# Altium PCB ESP32_USBC_PCB.PcbDoc (part 3 of 3)
Units mil, origin at the board's own origin, x right, y up, seen from the top; angles counter-clockwise.
Board outline 2700 x 1000 mil, 4 copper layers (L1, L2, L3, L4), stack 61.583 mil thick; 64 components, 73 nets, 299 pads, 162 vias.
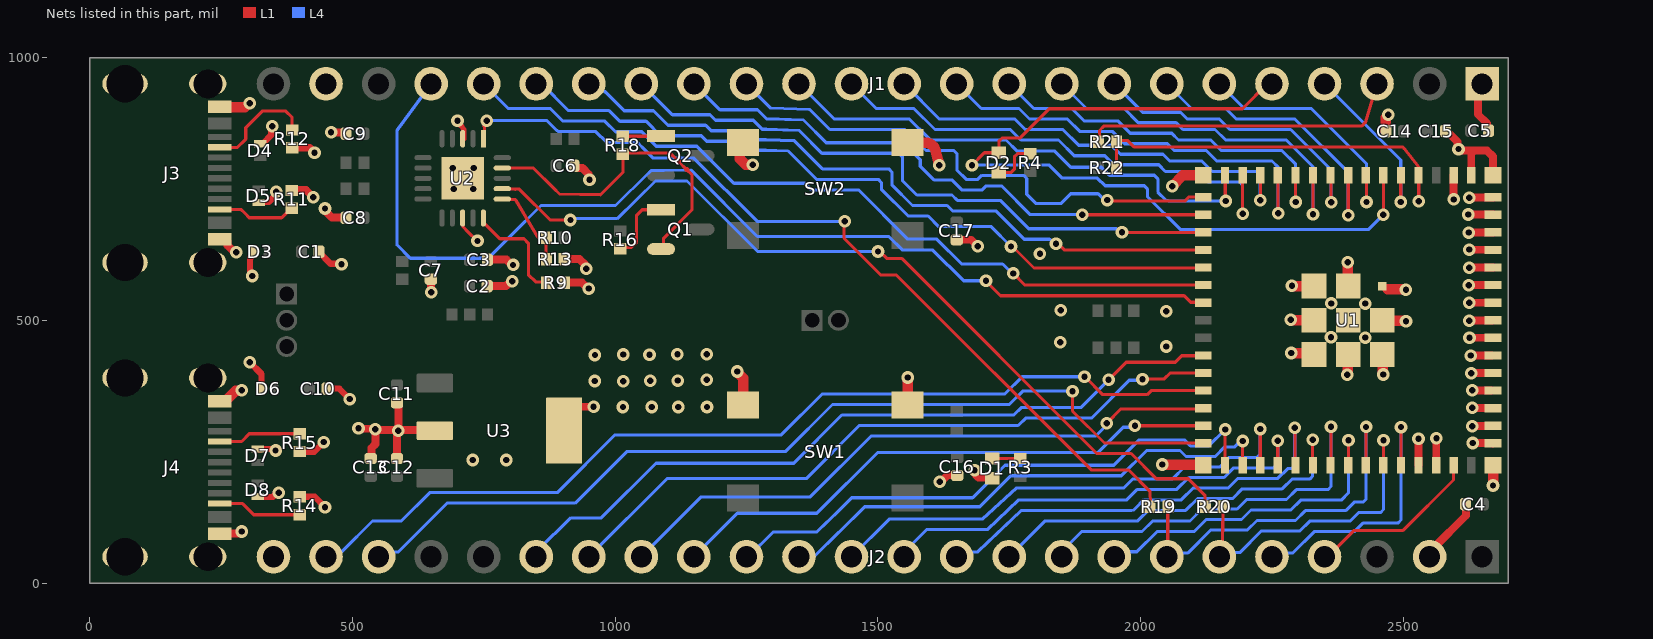
[diagram p4: the nets of this part, all layers, seen from the top]

## Via types
v1: diameter 24, hole 12, L1 to L4, tented both sides, 162 vias

## Nets (pads, with @x,y where several pads share a name; then routed paths per layer and width w, separated by ;. In a path a pad name is that pad's centre, name@x,y a point inside that pad or via, vN(x,y) a via of type N, cw(c..) or ccw(c..) an arc to the next point about the centre after c; other vN are vias at no path point) (continued)
GND: C1.1 C2.1 C3.1 C4.1 C5.1 C6.1 C7.1 C8.1 C9.1 C10.1 C11.1 C12.1 C13.1 C14.1 C15.1 C16.1 C17.1 D1.1 D3.1 D4.1 D5.1 D6.1 D7.1 D8.1 J1.1 J1.23 J2.2 J2.24 J3.A1B12 J3.B1A12 J3.S1 J3.S2 J3.S3 J3.S4 J4.A1B12 J4.B1A12 J4.S1 J4.S2 J4.S3 J4.S4 R9.2 R11.1 R12.1 R13.2 R14.1 R15.1 SW1.3 SW1.4 SW2.3 SW2.4 U1.1 U1.2 U1.42 U1.43 U1.46 U1.47 U1.48 U1.49 U1.50 U1.51 U1.52 U1.53 U1.54 U1.55 U1.56 U1.57 U1.58 U1.59 U1.60 U1.61 U1.62 U1.63 U1.64 U1.65 U1.66 U1.67 U1.68 U1.69 U1.70 U1.71 U1.72 U1.73 U2.3 U2.13 U2.21 U3.2 U3.4 | length 3754.5
  L1 w6: U2.13@710.68,693.24 710.68,677.85 719.91,668.62 v1@737.57,650.95
  L1 w10.01: C9.1@483.07,857.58 C9.1@488.07,855 ; v1(700.18,879.77) v1@705.47,871 ; v1@707.51,870.62 712.04,863.11 U2.3@712.04,845.03
  L1 w12: v1(305,420) 327.2,397.8 D6.1@327.2,370 ; v1(309.54,584.13) 309.54,587.38 305.37,591.55 305.37,618.24 312.2,625.08 D3.1@312.2,630 ; D7.1@319.06,254.14 D7.1@325.84,254.14 ; D7.1@320.03,255.03 351.17,255.03 v1@356.76,249.44 ; D8.1@320.64,163.77 348.52,163.77 356.75,172 v1(360,172) ; D5.1@322.17,724.07 323.06,724.96 341.23,724.96 352.78,736.5 352.78,742.27 v1(355.07,744.56) ; D4.1@324.5,835.79 329.43,835.79 330.32,836.68 330.32,836.78 346.05,852.52 346.05,867.8 v1(347.63,869.37) ; R14.1@400,164.02 428.31,164.02 v1(447.96,144.37) ; R15.1@400,250 427.67,250 v1(445.89,268.22) ; C1.1@436.88,630.53 436.88,629.35 458.48,607.75 478.13,607.75 v1(479.37,606.51) ; C10.1@451.93,370 475,370 v1(495,350)
  L1 w15: J4.B1A12@247.64,94.09 247.94,94.4 285.92,94.4 v1(289.6,98.08) ; J3.B1A12@247.64,653.94 258.46,653.94 262.78,649.63 262.78,642.44 274.34,630.88 277.37,630.88 v1(279.1,629.16) ; R11.1@385.09,747.62 412.16,747.62 v1(425.44,734.34) ; R12.1@385.54,828.18 418.82,828.18 v1(428,819) ; v1(448.14,712.69) 449.87,710.97 449.87,706.93 461.09,695.71 484.94,695.71 485.65,695 C8.1@488.07,695 ; v1(459.61,857.58) C9.1@483.07,857.58 ; v1(511.83,294.39) 512.64,293.57 543,293.57 544.28,292.3 544.28,264.73 536.22,256.67 536.22,238.15 C13.1@535,236.93 ; v1@545.26,291.31 545.3,291.27 585.85,291.27 v1(587.34,289.79) v1@588.25,290.71 ; C11.1@585,343.07 585.12,343.07 588.25,339.94 v1@588.25,290.71 ; C12.1@585.21,237.14 585.21,285.23 588.25,288.27 v1@588.25,288.87 ; C7.1@649.62,577.96 649.82,577.76 649.82,553.25 v1(650.02,553.05) ; U3.2@656.97,290 655.66,291.31 588.86,291.31 v1@588.25,290.71 ; C2.1@756.93,565 792.39,565 801.86,574.48 v1(804.3,574.48) ; C3.1@757.56,615.31 793.54,615.31 803.52,605.33 v1(805.96,605.33) ; U3.4@903.03,290 U3.4@903.03,308.07 ; R13.2@903.38,616.25 932.43,616.25 943.65,605.03 943.65,599.72 v1(945.38,598) ; R9.2@903.72,571.74 936.85,571.74 948.31,560.27 v1(949.81,560.27) ; C6.1@921.59,793.96 921.59,792.78 924.72,789.65 937.97,789.65 949.54,778.08 949.54,769.17 v1(951.26,767.45) ; U3.4@929.98,335.02 929.98,335.43 v1(959.09,335.43) ; v1(1618,193) 1620.44,193 1632.82,205.39 C16.1@1641.97,205.39 ; C17.1@1650.06,653.13 1677.87,653.13 v1(1690,641) ; v1(1684.14,214.41) 1685.86,212.69 1685.86,206.31 1691.38,200.8 D1.1@1716.8,200.8 ; U1.42@2528.94,224.48 v1(2528.94,274.63) ; J2.2@2558.42,58.42 2558.42,67.63 2618.95,128.16 2618.95,149.12 C4.1@2618.07,150 ; U1.43@2562.46,225.22 2562.65,225.42 2562.65,275.41 v1(2562.94,275.7) ; C15.1@2579.93,860 2579.93,858.82 2583.06,855.69 2586.94,855.69 2603.28,839.35 2603.28,827.47 v1(2605,825.75) ; v1(2595.77,729.97) U1.2@2595.83,775.59 ; v1@2605.77,824.98 2610.66,824.98 2612.46,823.19 2635.69,823.19 ; v1(2623.63,701.36) 2623.92,701.07 2670.35,701.07 U1.59@2670.63,700.79 ; v1(2624.39,666.87) 2624.61,667.1 2670.4,667.1 U1.58@2670.72,667.42 ; v1(2624.69,566.58) 2624.86,566.75 2669.84,566.75 U1.55@2670.01,566.58 ; v1(2625.18,498.95) 2625.86,499.63 2669.19,499.63 U1.53@2669.58,500.01 ; v1(2625.29,533.3) 2625.37,533.38 2670.8,533.38 U1.54@2670.88,533.3 ; v1(2625.29,634.5) 2625.61,634.18 2670.28,634.18 U1.57@2670.72,633.74 ; v1(2625.29,732.98) 2626.18,733.88 U1.60@2671.01,733.88 ; v1(2625.44,599.86) 2625.71,600.13 2670.65,600.13 U1.56@2670.72,600.06 ; v1(2625.9,466.77) 2626.02,466.65 2670.26,466.65 U1.52@2670.5,466.41 ; v1(2628.18,432.79) 2628.32,432.93 2668.01,432.93 U1.51@2668.06,432.99 ; U1.1@2629.29,775.59 2629.29,816.79 2635.69,823.19 ; v1(2629.37,399.18) 2629.59,399.39 2666.91,399.39 U1.50@2667.1,399.58 ; v1(2630.84,298.34) 2631.34,298.84 2665.62,298.84 U1.47@2666.03,299.25 ; v1(2630.93,333.27) 2631.22,332.97 2666.28,332.97 U1.48@2666.53,332.72 ; v1(2631,367) 2631.48,366.52 2666.5,366.52 U1.49@2667.04,365.97 ; v1(2631.81,266.49) 2632.18,266.12 2669.94,266.12 U1.46@2670.22,265.83 ; J1.1@2650,950 2641.73,941.73 2641.73,892.02 2659.02,874.72 C5.1@2659.02,863.95 ; U1.62@2670.63,775.59 2670.63,811.47 2658.91,823.19 2635.69,823.19
  L1 w20: J4.A1B12@247.64,346.06 258.46,346.06 278.55,366.15 288.71,366.15 v1(289.48,366.92) ; J3.A1B12@248.54,905.01 295.34,905.01 303.54,913.21 v1(304.62,913.21) ; v1(1232.38,402.55) 1232.38,401.46 1244.3,389.54 SW1.4@1244.3,339.38 ; SW2.4@1246,836.09 SW2.4@1243.5,838.58 ; SW2.4@1261.64,822.99 1246.05,838.58 SW2.4@1243.5,838.58 ; v1(1262,796) 1248.72,796 1237,807.72 1237,832.08 SW2.4@1243.5,838.58 ; SW1.3@1556.5,338.58 1557,339.09 v1(1557,391) ; SW2.3@1559.55,835.53 SW2.3@1556.5,838.58 1577.01,838 1590.47,838 cw(c1590.47,818) 1609.85,822.96 v1(1617,795) ; v1(2041.35,225.45) 2041.87,224.93 2118.93,224.93 U1.64@2119.45,224.41 ; v1(2060,755) 2080.59,775.59 U1.63@2119.45,775.59 ; v1(2285.8,500.86) 2286.23,500.43 2328.83,500.43 U1.72@2329.11,500.15 ; v1(2286.77,437.77) 2287.53,437 2324.73,437 U1.73@2328.25,433.48 ; v1(2287.98,565.41) 2288.2,565.19 2329.85,565.19 U1.71@2330.08,564.96 ; v1(2393.4,396.31) 2394.17,397.07 2394.17,426.92 U1.70@2394.94,427.69 ; v1(2394.14,610.15) 2394.59,609.71 2394.59,575.35 U1.69@2395.55,574.4 ; U1.68@2459.74,427.37 2460.77,426.34 2460.77,397.53 v1(2461.54,396.77) ; C14.1@2466.81,859.84 2466.81,885.48 2471.33,890 v1(2471.33,891.09) ; 2470.08,558.57 2504.24,558.57 v1(2504.92,557.89) ; U1.67@2471.33,498.55 2471.49,498.71 2504.4,498.71 v1(2505.16,497.95) ; J2.2@2550,50 J2.2@2558.42,58.42 ; v1(2605,825.75) v1@2605.77,824.98 ; v1@2670.7,185.7 U1.65@2670.7,224.34
  other v1: 2670.63,185.63 729,234 793,234 353.97,252.23 543.82,292.76 1015,335 1070,335 1120,335 1175,335 961.47,384.4 1015.84,383.98 1066.82,384.62 1119.07,385.25 1174.28,386.52 961.68,433.9 1065.55,434.12 1015.84,434.75 1118.64,435.38 1174.49,435.38 2049,450 1847,458 2427.7,467.09 2362.45,467.55 2049,517 1848,519 2363.06,532.08 2427.52,531.76 1808.48,626.51 738.15,650.95 693.04,749.62 730.04,749.62 691.04,789.62 731.04,789.62
GPIO0: R21.2 R22.2 U1.4 | length 716
  L1 w6: R22.2@1954.02,790 R21.2@1954.02,841.18 ; R21.2@1954.02,838.82 1957.43,842.24 1974.94,842.24 1987.21,829.97 2498.44,829.97 2501.77,826.64 2529.51,791.68 U1.4@2529.51,776.21 ; U1.4@2528.9,775.59 2529.2,775.29 2529.2,727.05 v1(2529.5,726.75)
GPIO1: J1.4 U1.5 | length 335.2
  L1 w6: v1(2495,725) U1.5@2495,775.16
  L4 w6: J1.4@2350,950 2495,805 v1(2495,725)
GPIO2: D2.1 J1.5 U1.6 | length 1586.3
  L1 w6: v1(1679.26,795.16) 1702.8,818.7 1725.6,818.7 1730.19,818.7 D2.1@1730,818.7 ; D2.1@1730.4,818.9 1730.4,840.72 1736.25,846.57 1770.07,846.57 1826.09,902.59 2193.94,902.59 2241.34,950 J1.5@2250,950 ; v1(2462.04,701.01) U1.6@2462.04,776.56
  L4 w6: v1(1679.26,795.16) 1679.75,795.65 1825.46,795.65 1850.61,770.5 1917.79,770.5 1932.43,755.86 2007.14,755.86 2013,750 2013,735.53 2075.49,673.04 2434.07,673.04 v1(2462.04,701.01) ; J1.5@2250,950 J1.5@2256.59,943.41
GPIO3: J1.6 U1.7 | length 466
  L1 w6: v1(2430,725) U1.7@2430,775.16
  L4 w6: J1.6@2150,950 2197,903 2324.94,903 2429.94,798 v1@2429.94,725.06
GPIO4: J1.7 U1.8 | length 571.9
  L1 w6: v1(2395.04,700.04) U1.8@2395.04,775.59
  L4 w6: J1.7@2050,950 2097,903 2162,903 2182,883 2293.72,883 2395.04,781.68 v1(2395.04,700.04)
GPIO5: J1.8 U1.9 | length 591.8
  L1 w6: v1(2362.59,724.8) U1.9@2362.59,774.96
  L4 w6: J1.8@1950,950 2004.14,895.86 2075.86,895.86 2088.72,883 2150,883 2170,863 2285.43,863 2362.59,785.84 v1(2362.59,724.8)
GPIO6: J1.9 U1.10 | length 709.5
  L1 w6: v1(2328.13,701.66) U1.10@2328.13,777.21
  L4 w6: J1.9@1850,950 1897,903 1968.72,903 1995.86,875.86 2067.57,875.86 2080.43,863 2141.72,863 2161.72,843 2277.15,843 2328.13,792.02 v1(2328.13,701.66)
GPIO7: J1.10 U1.11 | length 730.5
  L1 w6: v1(2295,725) U1.11@2295,775.16
  L4 w6: J1.10@1750,950 1797,903 1868.72,903 1892.29,879.43 1956.43,879.43 1980,855.86 2059.29,855.86 2072.15,843 2133.43,843 2153.43,823 2268.86,823 2295,796.86 v1(2295,725)
GPIO8: J1.11 U1.12 | length 838.2
  L1 w6: v1(2261.74,703.48) U1.12@2261.72,776.48
  L4 w6: J1.11@1650,950 1697,903 1768.72,903 1788.72,883 1860.43,883 1884,859.43 1946.43,859.43 1970,835.86 2051.01,835.86 2063.86,823 2125,823 2145,803 2250,803 2261.71,791.29 v1(2261.74,703.48)
GPIO9: J1.12 U1.13 | length 847.2
  L1 w6: v1@2227.86,726.28 U1.13@2227.86,775.44
  L4 w6: J1.12@1550,950 1617,883 1760.43,883 1780.43,863 1852.15,863 1882.07,833.07 1944.5,833.07 1961.72,815.86 2042.72,815.86 2055.58,803 2116.72,803 2136.72,783 2222,783 2227.86,777.14 v1@2227.86,728.58
  other v1: 2227.62,728.34
GPIO10: J1.13 U1.14 | length 951.6
  L1 w6: v1(2194.2,702.52) U1.14@2194.18,775.52
  L4 w6: J1.13@1450,950 1497,903 1568.72,903 1608.72,863 1752.15,863 1772.15,843 1843.86,843 1873.79,813.07 1931.78,813.07 1949,795.86 2034.44,795.86 2047.29,783 2108.43,783 2128.43,763 2188.3,763 2194.16,757.14 v1@2194.16,702.56
GPIO11: J1.14 U1.15 | length 966
  L1 w6: v1@2161.14,728.02 U1.15@2161.14,774.69
  L4 w6: J1.14@1350,950 1417,883 1560,883 1594.86,848.14 1595.29,848.14 1600.43,843 1743.86,843 1765.07,821.79 1836.79,821.79 1867.35,791.23 1925.34,791.23 1940.72,775.86 2026.15,775.86 2033,769.01 2033,743.82 2048.82,728 2052.42,728 2053.43,726.99 v1(2162.17,726.99)
GPIO12: J1.15 U1.16 | length 1025.2
  L1 w6: v1(1936.77,728.67) 1938.71,726.73 2084,726.73 2092.13,734.87 U1.16@2118.83,734.87
  L4 w6: J1.15@1250,950 1293.55,906.45 1296.33,903.67 1370.8,900.91 1373.58,898.14 1408.72,863 1551.72,863 1554.64,860.07 1583.19,831.53 1591.72,823 1644.83,823 1650.68,817.14 1650.68,785.54 1668.07,768.16 1690.44,768.16 1697.93,775.65 1777.53,775.65 1783.38,769.79 1783.38,739.92 1801.28,722.02 1848.18,722.02 1867.02,740.86 1919.14,740.86 1931.34,728.67 v1(1936.77,728.67) v1@1932.99,728.67
GPIO13: J1.16 U1.17 | length 1085.2
  L1 w6: v1(1889,701) 1889.21,700.79 U1.17@2119.45,700.79
  L4 w6: J1.16@1150,950 1196.47,903.53 1199.4,900.6 1271.12,900.6 1285.36,886.36 1288.14,883.58 1358.65,880.97 1401.86,837.75 1548.68,837.75 1580.76,805.67 1580.76,793.06 1606.72,767.1 1640.73,767.1 1659.68,748.16 1698.72,748.16 1706.22,755.65 1735.35,755.65 1790,701 v1(1889,701)
GPIO14: J1.17 U1.18 | length 1212.3
  L1 w6: v1(1964.68,667.32) U1.18@2119.45,667.32
  L4 w6: J1.17@1050,950 1108.99,891.01 1176.57,891.01 1180.71,891.01 1191.12,880.6 1262.83,880.6 1276.92,866.51 1279.85,863.58 1287.76,863.58 1350.06,861.27 1352.84,858.49 1393.57,817.75 1540.39,817.75 1546.73,811.41 1546.73,765.98 1574.26,738.45 1641.1,738.45 1651.39,728.16 1732.84,728.16 1786.89,674.11 1877.71,674.11 1877.82,674 1900.18,674 1900.29,674.11 1954.1,674.11 1960.89,667.32 v1(1964.68,667.32)
GPIO15: J1.18 U1.19 | length 1314
  L1 w6: v1(1839.07,645.79) 1842.86,645.79 1854.8,633.86 U1.19@2119.45,633.86
  L4 w6: J1.18@950,950 964.61,950 979.8,934.81 981.28,934.81 1017.5,898.59 1073.12,898.59 1100.71,871.01 1168.28,871.01 1172.42,871.01 1182.83,860.6 1254.55,860.6 1268.64,846.51 1271.57,843.58 1287.39,843.58 1341.02,841.59 1394.58,788.04 1520.87,788.04 1526.73,782.18 1526.73,757.69 1565.98,718.45 1631.91,718.45 1642.2,708.16 1724.56,708.16 1778.6,654.11 1826.97,654.11 1835.29,645.79 v1(1839.07,645.79)
GPIO16: J1.19 U1.20 | length 1421.8
  L1 w6: v1(1753.47,640.44) 1756.37,640.44 1797.3,599.51 2118.56,599.51 U1.20@2119.45,600.39
  L4 w6: J1.19@850,950 860.47,950 911.44,899.02 988.79,899.02 1009.22,878.59 1059,878.59 1086.58,851.01 1164,851.01 1165.28,849.87 1174.55,840.6 1246.26,840.6 1256.88,829.98 1263.28,823.58 1287.02,823.58 1329.36,822.01 1332.14,819.23 1383.33,768.04 1387.48,768.04 1500.87,768.04 1506.73,762.18 1506.73,749.41 1557.7,698.45 1595.69,698.45 1615.95,678.19 1715.72,678.19 v1(1753.47,640.44)
GPIO17: J1.20 U1.21 | length 1528.1
  L1 w6: v1(1757.59,589.11) 1779.59,567.11 2119.27,567.11 U1.21@2119.45,566.93
  L4 w6: J1.20@750,950 797.19,902.81 877.06,902.81 900.84,879.02 980.5,879.02 1000.93,858.59 1050.72,858.59 1078.3,831.01 1155.59,831.01 1158.11,828.49 1158.37,828.49 1226.09,760.78 1360.84,760.78 1373.58,748.04 1463.32,748.04 1557.04,654.32 1612.34,654.32 1659.5,607.17 1737.46,607.17 1755.52,589.11 v1(1757.59,589.11)
GPIO18: J1.21 U1.22 | length 2045.8
  L1 w6: v1@1705.85,574.2 1733.35,546.7 2082.87,546.7 2095.36,534.21 2118.7,534.21 U1.22@2119.45,533.46
  L4 w6: J1.21@650,950 586.93,863.9 585,861.26 585,857.99 585,736.49 584.88,736.37 584.88,643.72 585,643.6 585,643.5 610.5,618 758.6,618 800.47,659.86 800.6,659.86 859.05,718.32 1000.81,718.32 1062.81,779.21 1068.6,785 1092.86,785 1144.67,785.63 1270.78,659.51 1521.14,659.51 1547.09,633.56 1604.82,633.56 1663.25,575.13 v1(1705.85,575.13)
GPIO21: J2.19 U1.25 | length 1432.3
  L1 w6: v1(1939.09,386.73) 1972.46,420.1 2066.13,420.1 2078.44,432.4 U1.25@2118.78,432.4
  L4 w6: J2.19@850,50 850.13,59.79 853.05,62.71 915.97,124 974,124 1078,228 1340,228 1431.67,319.67 1758.72,319.67 1772.88,333.83 1886.18,333.83 v1(1939.09,386.73)
GPIO26: J2.18 U1.26 | length 1314.3
  L1 w6: v1(2003.68,387.92) 2004.14,388.38 2045.05,388.38 2056.28,399.61 U1.26@2119.45,399.61
  L4 w6: J2.18@950,50 1098.75,198.75 1363.75,198.75 1464.67,299.67 1767,299.67 1781.16,313.83 1906.58,313.83 1978.57,385.81 2001.58,385.81 v1(2003.68,387.92)
GPIO33: J2.17 U1.28 | length 1188.4
  L1 w6: v1(1935.34,303.85) 1962.76,331.27 2118.05,331.27 U1.28@2119.45,332.68
  L4 w6: J2.17@1050,50 1164,164 1371.57,164 1487.24,279.67 1877.37,279.67 1877.45,279.59 1914.19,279.59 1935.34,300.74 v1(1935.34,303.85)
GPIO34: J2.16 U1.29 | length 1072.7
  L1 w6: v1(1989.21,299.21) U1.29@2119.45,299.21
  L4 w6: J2.16@1150,50 1232.66,132.66 1384,132.66 1499.51,248.17 1918.39,248.17 1966.75,296.53 1986.53,296.53 v1(1989.21,299.21)
GPIO35: J2.15 U1.31 | length 1086.5
  L1 w6: U1.31@2161.09,226.22 2160.94,226.37 2160.94,291.92 v1(2161.09,292.07)
  L4 w6: J2.15@1250,50 1253.15,50 1300.95,97.1 1384.12,97.1 1426.43,138.75 1450.04,162.36 1680.36,162.36 1742,224 1948.85,224 1997.3,272.45 2083.16,272.45 2094.74,260.87 2129.89,260.87 v1(2161.09,292.07)
GPIO36: J2.14 U1.32 | length 998.2
  L1 w6: U1.32@2194.23,222.21 v1@2194.23,270.34
  L4 w6: J2.14@1350,50 1378.63,50 1475.12,145.09 1693.95,145.09 1752.85,204 1963.14,204 2011.4,252.25 2029.97,252.25 2030.17,252.45 2052.02,252.45 2052.22,252.25 2075.08,252.25 2086.46,240.87 2142.29,240.87 2160.46,259.04 2179.09,259.04 2187.74,267.68 2191.21,267.68 2194,264.9 2194,270.16 v1(2194.21,270.36)
GPIO37: J2.13 U1.33 | length 970.6
  L1 w6: U1.33@2227.75,227.74 v1@2227.75,293.16
  L4 w6: J2.13@1450,50 1521.69,121.69 1698.9,121.69 1764.3,181 1766.61,181 1968.43,181 1985.56,198.14 2060.86,198.14 2083.6,220.87 2150.58,220.87 2168.74,239.04 2221.92,239.04 2227.77,244.9 v1(2227.77,293.19)
GPIO38: J2.12 U1.34 | length 878.7
  L1 w6: U1.34@2261.15,224.25 v1(2261.12,270.59)
  L4 w6: J2.12@1550,50 1550,59.05 1592.63,101.69 1708.52,101.69 1768.09,158.29 1770.48,158.29 1899.01,158.29 1974,158.29 1993.85,178.14 2069.15,178.14 2091.88,200.87 2158.86,200.87 2177.03,219.04 2252.86,219.04 2261.12,227.29 v1(2261.12,270.59)
GPIO39: J2.11 U1.35 | length 860.7
  L1 w6: v1(2293.34,295.65) 2293.99,295 2293.99,222.39 U1.35@2294.87,221.51
  L4 w6: J2.11@1650,50 1659.26,59.26 1690.28,59.26 1773.42,138.29 1775.82,138.29 1982.28,138.29 1987.13,139 1990.06,141.93 2006.27,158.14 2077.43,158.14 2100.17,180.87 2167.15,180.87 2185.31,199.04 2261.15,199.04 2279.86,217.76 2287.48,217.76 2293.34,223.61 v1(2293.34,295.65)
GPIO40: J2.10 U1.36 | length 760
  L1 w6: U1.36@2327.45,222.21 v1(2327.45,272.37)
  L4 w6: J2.10@1750,50 1818.29,118.29 1994.71,118.29 2014.56,138.14 2085.72,138.14 2108.45,160.87 2175.43,160.87 2193.6,179.04 2269.43,179.04 2288.15,197.76 2321.59,197.76 2327.45,203.61 v1(2327.45,272.37)
GPIO41: J2.9 U1.37 | length 762.9
  L1 w6: U1.37@2362.41,221.78 v1(2362.41,297.33)
  L4 w6: J2.9@1850,50 1850,60 1888.11,98.11 2002.82,98.11 2022.84,118.14 2094,118.14 2116.74,140.87 2183.72,140.87 2201.88,159.04 2277.72,159.04 2296.43,177.76 2356.56,177.76 2362.42,183.61 v1(2362.41,297.33)
GPIO42: J2.8 U1.38 | length 646.3
  L1 w6: U1.38@2395.61,221.5 v1(2395.61,271.65)
  L4 w6: J2.8@1950,50 1959.63,59.63 1993.07,59.63 2031.58,98.14 2102.33,98.14 2125.07,120.87 2192,120.87 2210.17,139.04 2286,139.04 2304.72,157.76 2381.9,157.76 2395.61,171.46 v1(2395.61,271.65)
GPIO45: J2.5 U1.41 | length 526.9
  L1 w6: U1.41@2495.49,221.22 v1(2495.49,296.77)
  L4 w6: J2.5@2250,50 2257.03,57.03 2289.44,57.03 2330.17,97.76 2406.76,97.76 2423,114 2489.63,114 2495.49,119.86 v1(2495.49,296.77)
GPIO46: J2.4 U1.44 | length 334.5
  L1 w6: J2.4@2350,50 2356.19,50 2406.29,100.09 2499.52,100.09 2595.39,195.96 2595.39,223.97 U1.44@2595.83,224.41
GPIO47: J2.23 U1.27 | length 1826.9
  L1 w6: v1@1894.63,391.96 1928.01,358.58 2012.53,358.58 2020.09,366.14 U1.27@2119.45,366.14
  L4 w6: J2.23@450,50 460.33,60.33 480.78,60.33 538.41,117.96 593.46,117.96 647.5,172 890,172 1000,282 1316.4,282 1394.06,359.67 1741.72,359.67 1774.56,392.51 v1(1893.2,392.51)
GPIO48: J2.22 U1.30 | length 1762.9
  L1 w6: v1(1870.55,365.2) 1870.55,327.19 1931.33,266.41 1955.66,266.41 1955.81,266.56 1990.34,266.56 1990.65,266.25 U1.30@2118.94,266.25
  L4 w6: J2.22@550,50 559.1,59.1 587.37,59.1 680.27,152 924,152 1022,250 1324,250 1413.67,339.67 1750,339.67 1775.53,365.2 v1(1870.55,365.2)
JUMP_GPIO0: J1.3 R21.1 | length 609.9
  L1 w6: R21.1@1921.77,840.28 1921.77,861.21 1930.03,869.46 2418.03,869.46 2420.51,869.46 2427.59,876.54 J1.3@2450,950
NetD1_2: D1.2 R3.1 | length 53
  L1 w6: D1.2@1718,237 R3.1@1771,237.01
NetD2_2: D2.2 R4.1 | length 88.8
  L1 w6: D2.2@1730,781.3 1754.1,781.3 1759.96,787.16 1759.96,811.15 1765.81,817.01 R4.1@1790,817.01
NetJ3_A5: J3.A5 R12.2 | length 207.6
  L1 w6: J3.A5@248.06,828.71 281.32,828.71 295,842.4 297.31,844.71 297.31,866.53 328.76,897.98 373.36,897.98 385.54,885.79 R12.2@385.54,862.19
NetJ3_B5: J3.B5 R11.2 | length 151
  L1 w6: J3.B5@247.64,711.02 288.06,711.02 295,704.08 303.91,695.17 365.48,695.17 383.42,713.12 R11.2@384.6,713.12
NetJ4_A5: J4.A5 R15.2 | length 158.5
  L1 w6: J4.A5@247.64,269.29 289.29,269.29 304.02,284.02 R15.2@400,284.02
NetJ4_B5: J4.B5 R14.2 | length 161
  L1 w6: J4.B5@247.77,151.05 291.33,151.05 301.9,140.48 312.38,130 R14.2@400,130
NetQ1_1: Q1.1 R16.2 | length 138.4
  L1 w6: R16.2@1010,635.98 1012.55,638.53 1030.96,638.53 1041.05,648.62 1041.05,699.89 1051.56,710.39 Q1.1@1087.58,710.39
NetQ2_1: Q2.1 R18.2 | length 72.6
  L1 w6: R18.2@1015,850 1021.81,850.28 1065.86,850.28 Q2.1@1087.58,850.39
NetR9_1: R9.1 U2.15 | length 210
  L1 w6: U2.15@749.37,694.59 749.37,685.94 750.48,685.5 767.36,668.62 ; 767.38,668.6 780.75,655.23 826.64,655.23 835.14,646.73 835.14,586.69 848.76,573.07 867.71,573.07 R9.1@868.53,572.25
RTS_FTDI: Q1.2 R18.1 U2.19 | length 618.7
  L1 w6: U2.19@787.61,789.46 810.04,789.46 ; 808,789.84 844.42,789.84 883.04,751.22 894.29,740.18 972.29,738.71 1015,781.42 R18.1@1015,810.78 ; R18.1@1010.64,810.78 R18.1@1015,815.98 ; R18.1@1016.97,817.96 1105.12,817.96 1120.7,802.37 ; Q1.2@1087.8,635.59 1092.39,640.18 1092.39,656 1146.52,710.13 1146.52,776.56 1136.35,786.72 ; 1120.7,802.11 1136.09,786.72
  L1 w10.01: R18.1@1015,815.98 R18.1@1016.97,817.96 ; 1120.7,802.11 1120.7,802.37 ; 1136.09,786.72 1136.35,786.72
RXD_FTDI: R19.2 U2.1 | length 1630.8
  L1 w6: v1@749.6,869.64 755.63,875.67 v1(755.63,879.46) ; U2.1@751.63,856.56 v1@751.63,869.26 ; v1(1437.35,688.24) 1435.6,686.49 1435.6,656.24 1505.97,585.87 1535.53,585.87 1906.1,215.3 1976.89,215.3 2018.23,173.96 2018.82,151.81 R19.2@2017.99,145
  L4 w6: v1(755.63,879.46) 756.46,880.3 869.47,880.3 888.77,861 890.58,861 892.56,859.02 963.42,859.02 983.86,838.59 1042.43,838.59 1050.37,830.65 1050.53,830.5 1072.53,808.49 1150.09,808.49 1270.34,688.24 v1(1437.35,688.24)
TXD_FTDI: R20.2 U2.17 | length 1661.7
  L1 w6: U2.17@787.45,749.93 810.04,749.31 ; 808,749.69 815.62,749.49 818.01,749.42 819.7,747.73 876.69,690.73 v1(915.04,690.73) ; v1(1500.26,630.77) 1504.05,630.77 1516.97,617.85 1545.19,617.85 1916.63,246.41 1963.95,246.41 1964.09,246.56 1982.06,246.56 2030.17,198.45 2090.89,198.45 2118.26,171.08 2122.2,167.14 2122.2,166.31 2122.57,165.95 2122.57,145.43 R20.2@2122.99,145
  L4 w6: v1(915.04,690.73) 917.72,693.41 1003.99,693.41 1076.89,765 1137.01,765 1271.21,630.8 v1@1500.24,630.8
U0RXD: J2.6 R20.1 U1.40 | length 628.3
  L1 w6: J2.6@2150,50 2150.39,50.38 2155.43,55.42 2156.72,138.19 R20.1@2156.82,144.46 ; U1.40@2462.32,221.56 v1(2462.32,271.71)
  L4 w6: J2.6@2150,50 2157.89,57.89 2188.58,57.89 2229.74,99.04 2303.17,99.04 2321.88,117.76 2398.47,117.76 2414.72,134 2456.46,134 2462.32,139.86 v1(2462.32,271.71)
U0TXD: J2.7 R19.1 U1.39 | length 732.6
  L1 w6: J2.7@2050,50 2051.64,51.64 R19.1@2051.64,144.63 ; U1.39@2429.09,221.5 v1(2429.09,297.05)
  L4 w6: J2.7@2050,50 2057,57 2089.47,57 2133.35,100.87 2203.29,100.87 2221.45,119.04 2294.88,119.04 2313.6,137.76 2390.19,137.76 2406.43,154 2423.23,154 2429.09,159.86 v1(2429.09,297.05)
VBUS_SENSE: R10.1 R13.1 U2.16 | length 161.1
  L1 w6: U2.16@794.57,730.25 810.04,729.6 ; 808,729.98 809.5,729.92 811.68,727.73 852.43,659.06 854.72,656.76 R10.1@869.14,656.76 ; R13.1@868.76,612.6 R10.1@868.76,656.1
pads on no net: J1.24 J3.A8 J3.B8 J4.A8 J4.B8 U2.2 U2.4 U2.5 U2.6 U2.7 U2.14

## Polygon pours and split planes (outlines as drawn)
GND on L1 "GND_L01_P011" (solid, pour order 11): 1197.15,165.95 1200,168.81 1200,460 872.13,460 732.01,339.9 638.65,340.19 615.14,340 600.33,354.72 524.57,354.57 480,310 480,225 597.97,225 635,235 692.92,250.64 692.92,283.48 815,284.88 815,240 889.05,165.95
GND on L1 "GND_L01_P010" (solid, pour order 10): 2520,625 2520,620 2520,383.37 2286.63,383.37 2271.29,398.71 2271.29,625
+5V_VBUS2 on L1 "+5V_VBUS2_L01_P009" (solid, pour order 9): 345,419.51 345,448.37 353.94,461.46 360,470.05 375.35,470.05 400.23,469.56 402.51,469.53 403.64,468.4 430,435 430,307.95 375.59,307.95 352.88,307.95 346.03,314.8
+5V_VBUS1 on L1 "+5V_VBUS1_L01_P008" (solid, pour order 8): 330,678 407.14,677.26 414.01,670.1 413.84,643.22 414.01,637.6 413.44,540.2 397.2,530.26 395.14,530.06 395.12,529.94 355.35,529.91 354.74,530.06 331.21,535.77 331.21,590.74 328.07,676.07
+5V on L1 "+5V_L01_P006" (solid, pour order 6): 702.84,404.49 702.75,386.78 702.84,370.05 689.7,360.97 620.17,361.34 620.17,371.42 605.71,371.42 598.71,371.42 595.12,365.26 539.4,364.97 417.43,480 430,480 370.48,480 365.87,480.46 364.05,481.49 363.51,481.8 362.83,482.18 352.76,487.89 352.76,512.1 358.55,517.89 361,520 361.17,520.14 362.59,520.12 367.08,520.13 374.88,520.12 445,520 560,405
+3V3_REG on L1 "+3V3_REG_L01_P005" (solid, pour order 5): 477.06,198.57 477.06,150 670,150 694.84,181.44 694.84,214.2 688.34,220.1 627.07,220.1 615.6,214.5 591.94,214.59 580.18,214.63 530.15,214.82 493.12,214.63
+3V3_FTDI on L1 "+3V3_FTDI_L01_P004" (solid, pour order 4): 509,688.27 509,705 523,712 552,738.81 553.22,739.95 567.17,739.95 567.17,716.9 567.17,712 572.8,707 641,707 647,697.71 647,689.1 635.19,677.19 621.28,666.02 567.17,666.02 566,591 611.37,591 611.37,564.95 581.66,564.95 552,564.95 536,578 536,663
+3V3_FTDI on L1 "+3V3_FTDI_L01_P003" (solid, pour order 3): 827.55,858.5 846.45,867.5 890.55,867.5 901.22,856.83 899.11,781.64 875.24,781.64 868.87,787.41 855.27,800.83 850.29,806.16 837.19,806.07 826.27,813.09
+3V3 on L1 "+3V3_L01_P001" (solid, pour order 1): 2495.3,898.68 2487.67,855.55 2494.6,844 2559,844 2559,873 2570,889 2570,900 2566,907 2565,909 2504.17,909
GND on L2 "GND_L02_P014" (solid, remove dead copper, pour order 14): 2690,12 2690,991.51 2678.49,980 20,980 20,12 28,12 20,12 28,12
+3V3 on L2 "+3V3_L02_P012" (solid, pour order 12): 2685,986.51 905,986.51 908,822.82 961.48,759.51 1061.48,759.51 1138.64,682.35 1298.61,682.35 1405,575.96 1405,479.51 1454.26,479.51 1454.26,616.32 1393.48,677.05 1392.67,720 1866.34,720 1952.55,802.51 2531,802.51 2531,194 2487,150 2356.63,150 2313,122.79 2316.48,12 2662.97,12 2685,12 2685,16 2685,19
+3V3_REG on L2 "+3V3_REG_L02_P013" (solid, pour order 13): 475,221.09 475,142 694.84,142 694.84,220.59
GND on L3 (split plane): 2699.95,0.05 0.05,0.05 0.05,999.95 2699.95,999.95

## Silkscreen, mask and mechanical layers (free items; w line width, h text height)
Top Overlay:
  lines w6: 748.52,893.94 748.52,902.35 ; 751.69,92.84 751.69,107.2 ; 1248.95,895 1248.95,908.79 ; 1250.61,91.76 1250.61,106.12 ; 1749.94,95.74 1749.94,110.1 ; 1753,893 1753,906 ; 2249.91,893.47 2249.91,907.83 ; 2250.22,93.56 2250.22,107.93
  text "J1" at 2345,839 h40
  text "USER" at 1697,698 h40
  text "BOOT/USR" at 1253.31,569.99 h40
  text "USB1" at 424.39,538.64 h40
  text "UART" at 35,523 h40
  text "3V3" at 1487,483 h40
  text "REG" at 1211.61,481.65 h40
  text "+5V" at 435.24,477.9 h40
  text "ESP" at 47,432 h40
  text "USB2" at 434.14,419.66 h40
  text "RESET" at 1301.71,392.92 h40
  text "POWER" at 1695,292 h40
  text "J2" at 2331,125 h40
Bottom Overlay:
  text "GIO17" at 767.48,880.97 h40 r90
  text "GIO16" at 872.27,881.48 h40 r90
  text "GIO15" at 969.73,881.48 h40 r90
  text "GIO14" at 1069.63,880.6 h40 r90
  text "GIO12" at 1165.33,880.6 h40 r90
  text "GIO0" at 2469.41,880.61 h40 r90
  text "GIO12" at 1266.49,880.41 h40 r90
  text "GIO7" at 1773.76,879.7 h40 r90
  text "GIO6" at 1873.76,879.7 h40 r90
  text "GIO5" at 1968.76,879.7 h40 r90
  text "GIO4" at 2073.76,879.7 h40 r90
  text "GIO2" at 2273.76,879.7 h40 r90
  text "GIO1" at 2373.76,879.7 h40 r90
  text "+3V3" at 2573.76,879.7 h40 r90
  text "GND" at 2673.76,879.7 h40 r90
  text "GIO18" at 662.99,879.07 h40 r90
  text "GIO3" at 2169.97,879.37 h40 r90
  text "GIO11" at 1367.05,878.32 h40 r90
  text "GIO10" at 1466.57,878.32 h40 r90
  text "GIO8" at 1670.82,877.28 h40 r90
  text "GIO9" at 1569.73,876.24 h40 r90
  text "GND" at 468.96,874.86 h40 r90
  text "NC" at 368.1,872.76 h40 r90
  text "+5V" at 566.33,872.76 h40 r90
  text "<--PIN1-->" at 2668.57,704.15 h40 r90
  text "ESP-32 S3 MINI" at 1979.06,536.06 h70 r359.42
  text "Designed By Kaushik" at 1859.31,420.28 h40 r359.42
  text "GIO47" at 471.11,318.95 h40 r89.42
  text "GIO48" at 571.15,318.5 h40 r89.42
  text "GIO26" at 974.23,314.75 h40 r89.42
  text "GIO33" at 1072.18,314.36 h40 r89.42
  text "GIO35" at 1273.94,314.06 h40 r89.42
  text "GIO36" at 1373.94,314.06 h40 r89.42
  text "GIO37" at 1473.94,314.06 h40 r89.42
  text "GIO34" at 1176.23,313.4 h40 r89.42
  text "GIO38" at 1572.46,312.16 h40 r89.42
  text "GIO39" at 1677.55,309.07 h40 r89.42
  text "GIO40" at 1777.07,306.6 h40 r89.42
  text "GIO41" at 1871.65,306.6 h40 r89.42
  text "GIO45" at 2275.92,305.65 h40 r89.42
  text "GIO42" at 1971.4,305.04 h40 r89.42
  text "GIO21" at 863.94,304.06 h40 r89.42
  text "GIO46" at 2372.18,302.37 h40 r89.42
  text "USB-" at 668.94,279.06 h40 r89.42
  text "USB+" at 768.94,279.06 h40 r89.42
  text "+3V3" at 2668.68,278.54 h40 r89.42
  text "GND" at 368.94,244.06 h40 r89.42
  text "GND" at 2574.96,241.72 h40 r89.42
  text "TXD" at 2069.87,240.86 h40 r89.42
  text "RXD" at 2168.94,239.06 h40 r89.42
  text "EN" at 2472.96,203.63 h40 r89.42
Top Solder:
  drawing of 34 lines, arcs and shapes, not listed
Board Shape:
  lines w20: 0,0 0,994.2 0.8,995 2696,995 2696,0.9 2695.1,0 0,0

## Text inside footprints (layer, text, board x,y; h text height)
J1: Bottom Overlay "1" at 2631.29,1019.01 h40 r270
J2: Bottom Overlay "1" at 2627,-34 h40 r270
J5: Top Overlay "1" at 301,531 h40